# EAGLE board SCG-ECU_2.0_STM32F407_standalone_part_placement-EAGLE (EAGLE 7.5.0)
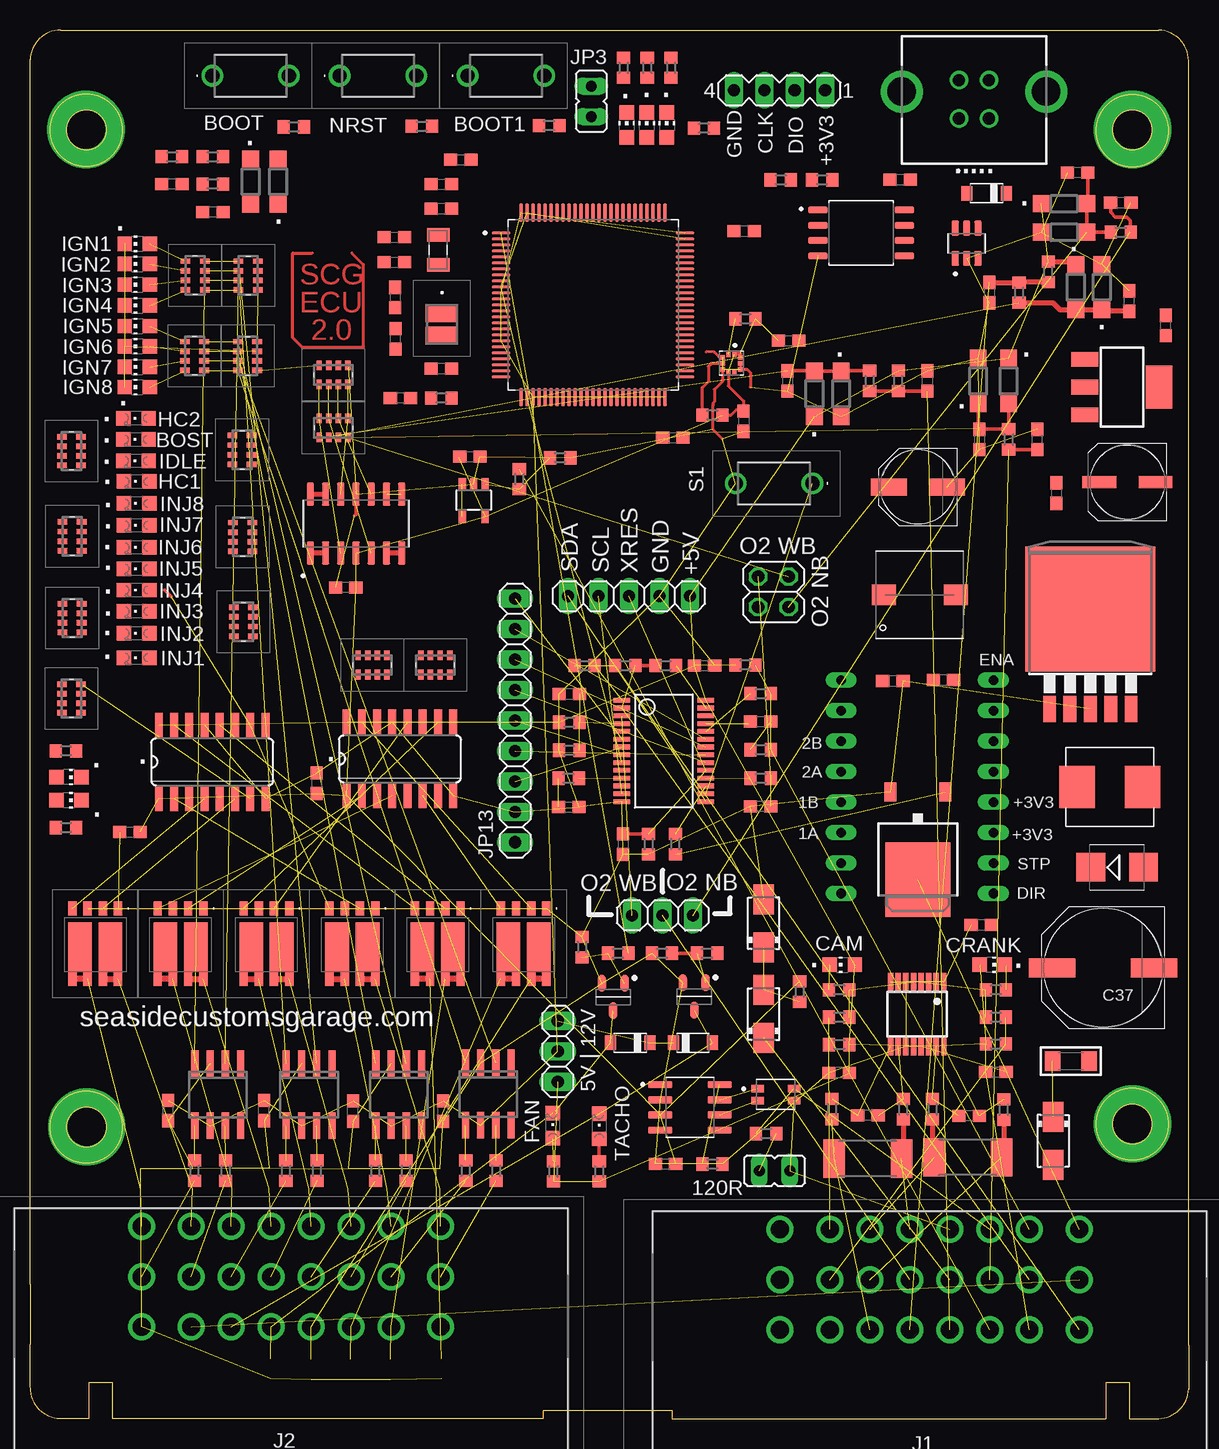
[diagram p0: board, top side]
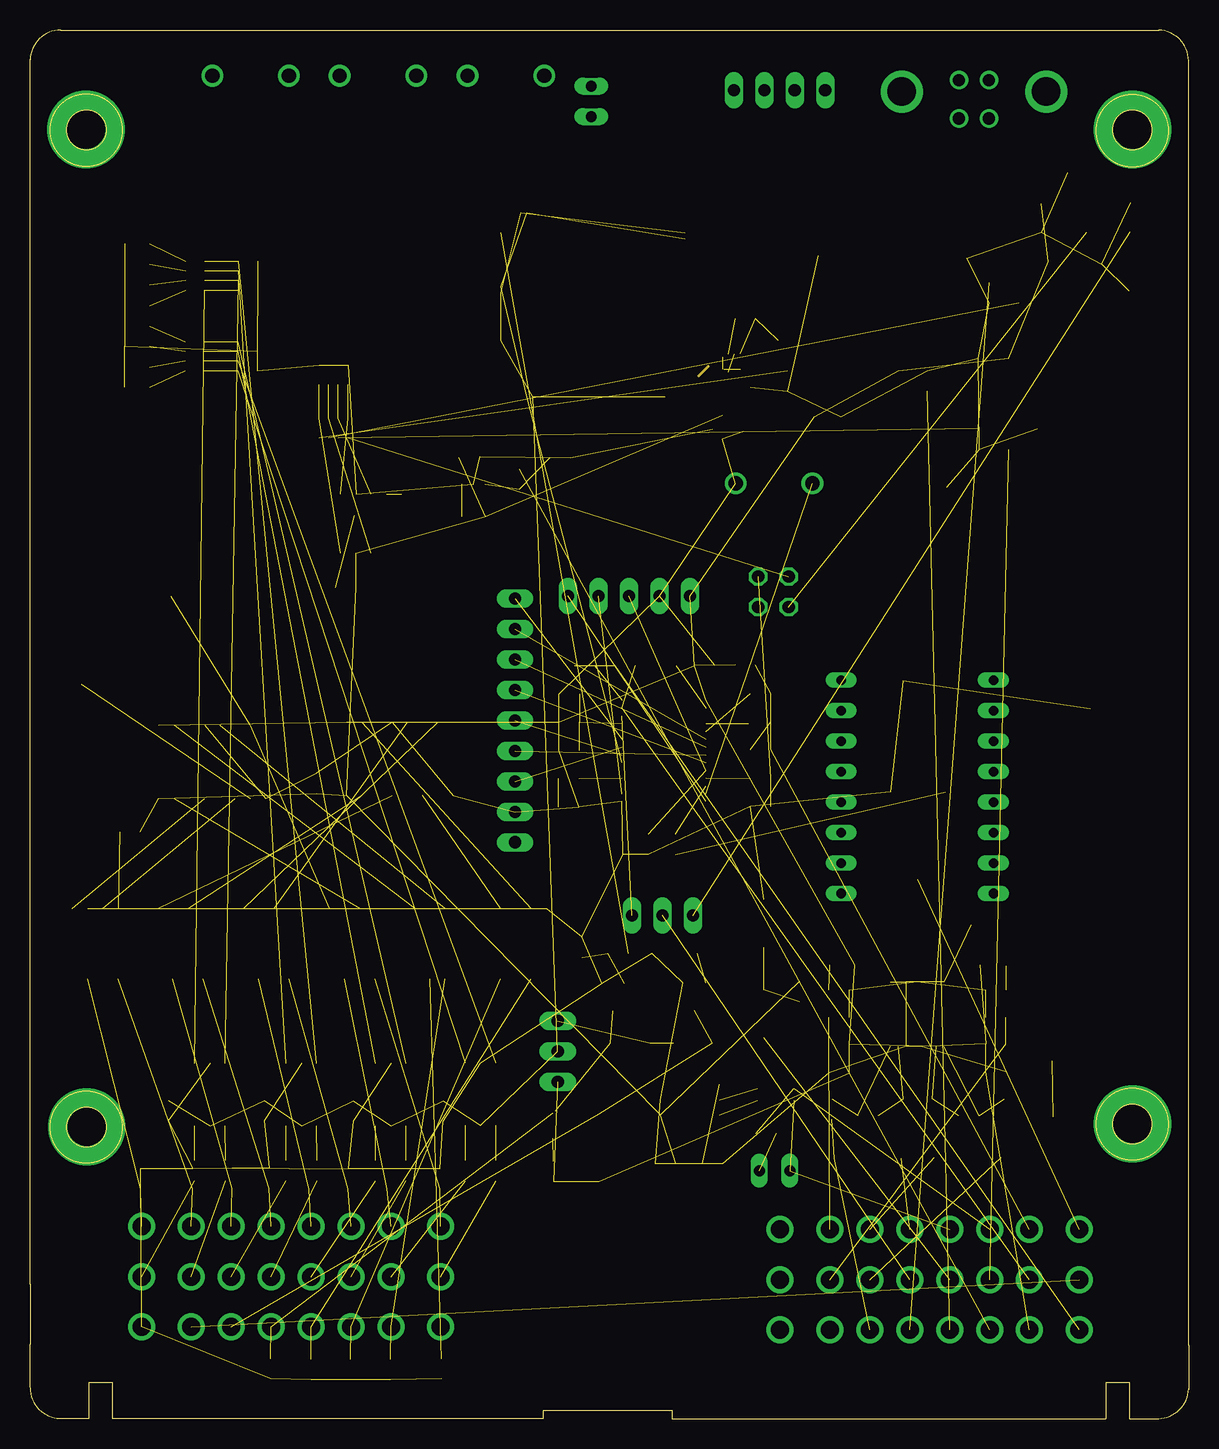
[diagram p1: board, inner layer POWER_AND_CPU]
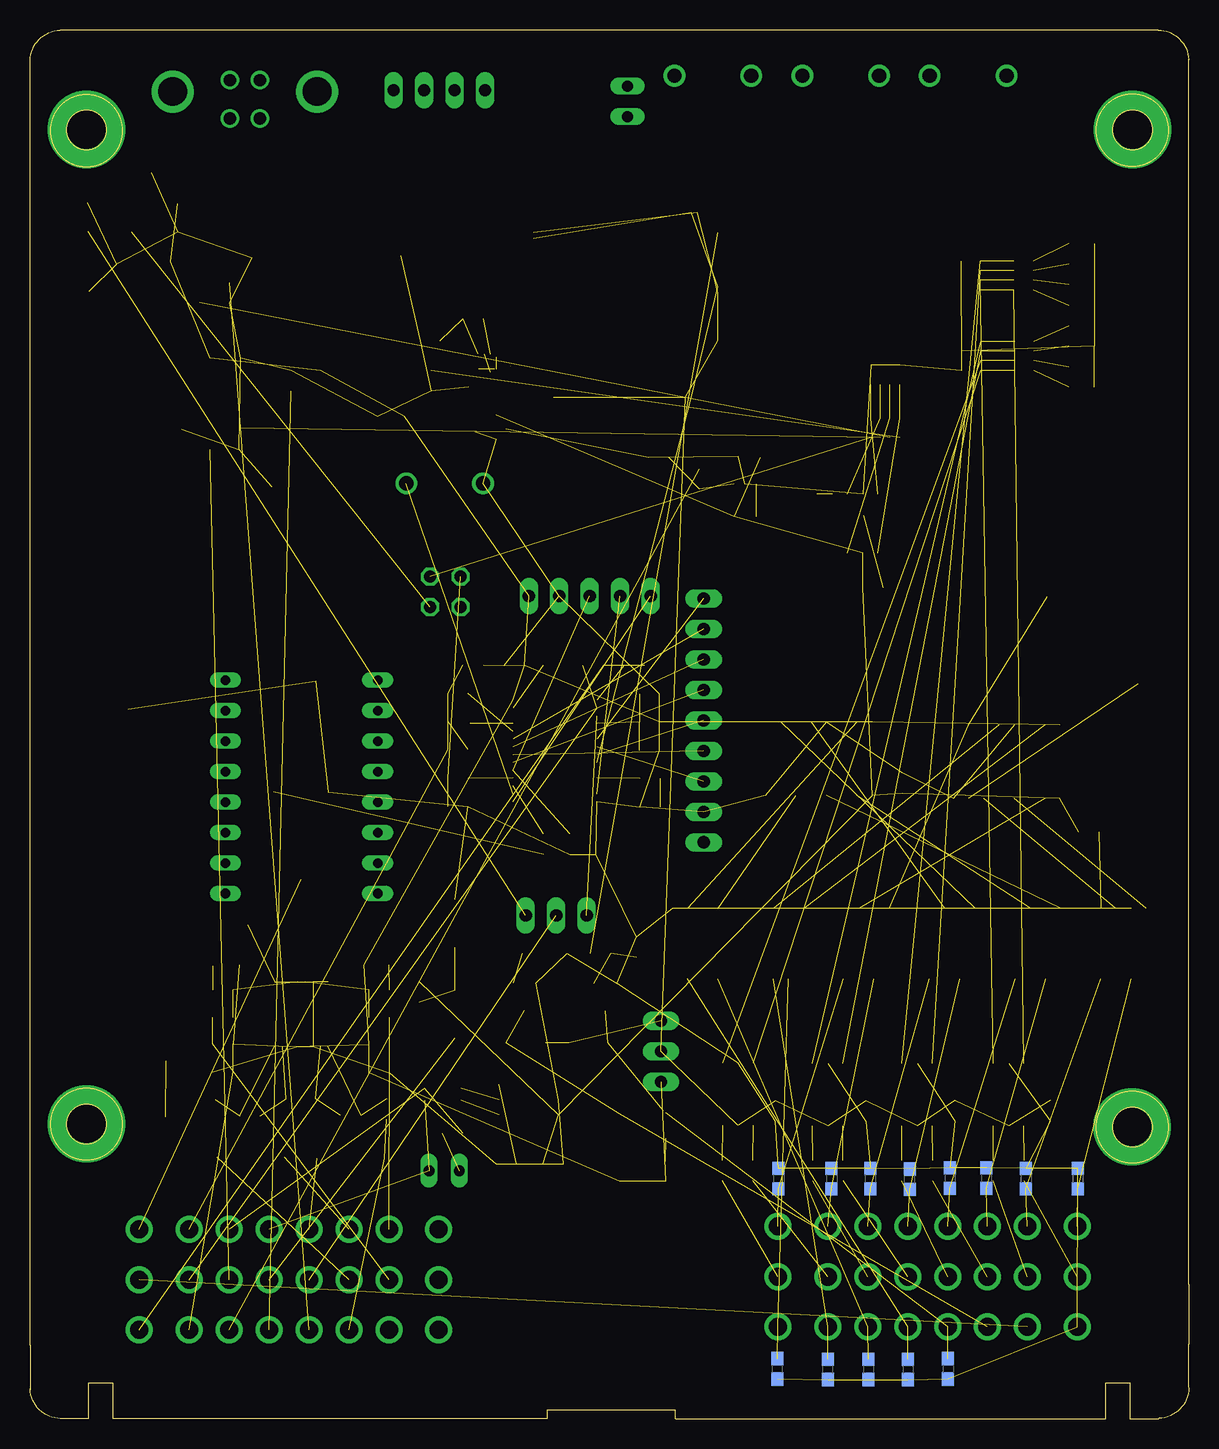
[diagram p2: board, bottom side, seen from below]

Size 96.6 x 115.75 mm. Coordinates in mm from the lower left corner, seen from the top.
Outline: 96.6,113.21 96.6,11.1 96.6,10.93 96.6,6.6 96.6,6.1 96.6,2.4
Outline: 94.1,0 91.7,0 91.7,3 89.7,3 89.7,0 53.5,0 53.5,0.7 42.8,0.7 42.8,0 6.9,0 6.9,3 4.9,3 4.9,0 2.5,0
Outline: 0,113.31 0,11.2 0,10.8 0,6.41 0,6.2
Outline: 0,2.6 0,6.2
Outline: 0,6.2 0,6.2
Outline: 33.92,115.76 94.1,115.76
Outline: 2.55,115.76 33.92,115.75
Outline: 0,2.56 arc86 2.49,0.01
Outline: 94.06,0 arc86 96.6,2.49
Outline: 96.59,113.2 arc86 94.1,115.75
Outline: 2.55,115.75 arc86 0,113.27
Outline: circle at 91.9,107.41 radius 1.65
Outline: circle at 91.9,107.36 radius 3
Outline: circle at 91.9,24.55 radius 1.65
Outline: circle at 91.9,24.55 radius 3
Outline: circle at 4.7,107.41 radius 1.65
Outline: circle at 4.7,107.41 radius 3
Outline: circle at 4.7,24.3 radius 1.65
Outline: circle at 4.7,24.3 radius 3
Copper layers (1*2*3*16): Top 0.035mm / dielectric 1.5mm / GND_AND_POWER 0.035mm / dielectric 0.15mm / POWER_AND_CPU 0.035mm / dielectric 0.2mm / Bottom 0.035mm
Design rules "default *": minimum track width 10mil, minimum drill 19mil, track to track 6mil, track to pad 6mil, pad to pad 6mil, via to via 6mil, smd to smd 6mil, copper to edge 40mil, drill to drill 6mil, minimum pad ring 10mil, minimum via ring 8mil, stop-mask expansion 4mil, vias tented up to drill 20mil, thermal gap 10mil

## Footprints (pad centres in the part's own frame; a part is rotated, then mirrored left to right if it is on the bottom)
PQFN50P200X200X80-10N = smd 0.43 x 0.35: 1 -0.745,0.25; 2 -0.745,-0.25; 6 0.745,-0.25; 7 0.745,0.25 | smd 0.35 x 0.43: 3 -0.5,-0.745; 4 0,-0.745; 5 0.5,-0.745; 8 0.5,0.745; 9 0,0.745; 10 -0.5,0.745
PTS636SM43LFS = drill 1.2 pad 1.8: 1 0,0; 2 6.4,0
CHIPLED_0805 = smd 1.2 x 1.2: A 0,-1.05; C 0,1.05
C0603 = smd 1.1 x 1: 1 -0.85,0; 2 0.85,0
PANASONIC_D = smd 3 x 1.4: + 2.4,0; - -2.4,0
UD-6,3X5,8_NICHICON = smd 2.8 x 1: + 2.35,0; - -2.35,0
PANASONIC_G = smd 3.9 x 1.6: + 4.25,0; - -4.25,0
SOD123 = smd 1.4 x 1.4: A 1.9,0; C -1.9,0
SOD3716X135N = smd 0.914 x 1.219: A 1.638,0; C -1.638,0
SMB = smd 2.4 x 2.4: A 2.2,0; C -2.2,0
DO214AC = smd 2.5 x 1.7: A 2,0; C -2,0
FIL_ACT1210L-201-2P-TL00 = smd 1.05 x 0.6: 1 -1.525,0.5; 2 -1.525,-0.5; 3 1.525,-0.5; 4 1.525,0.5
SO16 = smd 0.66 x 2.032: 1 -4.445,-3.073; 2 -3.175,-3.073; 3 -1.905,-3.073; 4 -0.635,-3.073; 5 0.635,-3.073; 6 1.905,-3.073; 7 3.175,-3.073; 8 4.445,-3.073; 9 4.445,3.073; 10 3.175,3.073; 11 1.905,3.073; 12 0.635,3.073; 13 -0.635,3.073; 14 -1.905,3.073; 15 -3.175,3.073; 16 -4.445,3.073
SOT223 = smd 1.219 x 2.235: 1 -2.311,-3.099; 2 0,-3.099; 3 2.311,-3.099 | smd 3.6 x 2.2: TAB 0,3.099
SOT23-5 = smd 0.6 x 1.05: 1 -0.95,-1.35; 2 0,-1.35; 3 0.95,-1.35; 4 0.95,1.35; 5 -0.95,1.35
TO263-5 = smd 1.067 x 2.159: 1 -3.404,-5.791; 2 -1.702,-5.791; 3 0,-5.791; 4 1.702,-5.791; 5 3.404,-5.791 | smd 10.8 x 10.41: 6 0,2.54
SSOP28 = smd 0.38 x 1.4: 1 -4.225,-3.5; 2 -3.575,-3.5; 3 -2.925,-3.5; 4 -2.275,-3.5; 5 -1.625,-3.5; 6 -0.975,-3.5; 7 -0.325,-3.5; 8 0.325,-3.5; 9 0.975,-3.5; 10 1.625,-3.5; 11 2.275,-3.5; 12 2.925,-3.5; 13 3.575,-3.5; 14 4.225,-3.5; 15 4.225,3.5; 16 3.575,3.5; 17 2.925,3.5; 18 2.275,3.5; 19 1.625,3.5; 20 0.975,3.5; 21 0.325,3.5; 22 -0.325,3.5; 23 -0.975,3.5; 24 -1.625,3.5; 25 -2.275,3.5; 26 -2.925,3.5; 27 -3.575,3.5; 28 -4.225,3.5
T0252 = smd 1 x 1.6: 1 -2.28,-6.07; 2 2.28,-6.07 | smd 5.4 x 6.2: 3 0,1.23
CHIP-LED0805 = smd 1.2 x 1.2: A 0,-1.05; C 0,1.05
HCCPHPE24BKA90FB = drill 1.5 pad 2.25: A1 0,0; A2 -4.15,0; A3 -7.48,0; A4 -10.81,0; A5 -14.14,0; A6 -17.47,0; A7 -20.8,0; A8 -24.95,0; B1 0,-4.2; B2 -4.15,-4.2; B3 -7.48,-4.2; B4 -10.81,-4.2; B5 -14.14,-4.2; B6 -17.47,-4.2; B7 -20.8,-4.2; B8 -24.95,-4.2; C1 0,-8.4; C2 -4.15,-8.4; C3 -7.48,-8.4; C4 -10.81,-8.4; C5 -14.14,-8.4; C6 -17.47,-8.4; C7 -20.8,-8.4; C8 -24.95,-8.4
M701-330442 = drill 1.02 pad 1.55: 1 1.25,2.25; 2 -1.25,2.25; 3 -1.25,-0.95; 4 1.25,-0.95 | drill 2.4 pad 3.5: 5 -6.02,0; 6 6.02,0
JP1 = drill 0.914 long: 1 0,-1.27; 2 0,1.27
1X03 = drill 1.016 long: 1 -2.54,0; 2 0,0; 3 2.54,0
1X05 = drill 1.016 long: 1 -5.08,0; 2 -2.54,0; 3 0,0; 4 2.54,0; 5 5.08,0
2X02 = drill 1.016 octagon: 1 -1.27,-1.27; 2 -1.27,1.27; 3 1.27,-1.27; 4 1.27,1.27
1X09 = drill 1.016 long: 1 -10.16,0; 2 -7.62,0; 3 -5.08,0; 4 -2.54,0; 5 0,0; 6 2.54,0; 7 5.08,0; 8 7.62,0; 9 10.16,0
WE-PD_7332/7345_PLASTIC_BASE = smd 1.7 x 2: 1 0,3; 2 0,-3
WE-LHMI_7030/7050 = smd 2.95 x 3.5: 1 -2.725,0; 2 2.725,0
L1206 = smd 1.3 x 1.6: 1 -1.524,0; 2 1.524,0
BUK9K5260RAX = smd 0.7 x 1.15: 1 -1.905,-3.026; 2 -0.635,-3.026; 3 0.635,-3.026; 4 1.905,-3.026 | smd 0.7 x 1.2: 5 1.905,2.849; 6 0.635,2.849; 7 -0.635,2.849; 8 -1.905,2.849 | smd 1.97 x 4.1: 9 1.27,0.199; 10 -1.27,0.199
SOT95P280X135-3N = smd 1.4 x 0.65: 1 -1.15,0.95; 2 -1.15,-0.95; 3 1.15,0
R0603 = smd 1 x 1.1: 1 -0.85,0; 2 0.85,0
R2512 = smd 1.8 x 3.2: 1 -2.8,0; 2 2.8,0
EXB38V561JV = smd 0.45 x 0.8: 1 -1.2,-0.8; 2 -0.4,-0.8; 3 0.4,-0.8; 4 1.2,-0.8; 5 1.2,0.8; 6 0.4,0.8; 7 -0.4,0.8; 8 -1.2,0.8
STEP-STICK = drill 0.8 long: 1A -8.89,-7.62; 1B -8.89,-5.08; 2A -8.89,-2.54; 2B -8.89,0; DIR 3.81,-12.7; EN 3.81,5.08; GND -8.89,-12.7; GNDM -8.89,2.54; MS1 3.81,2.54; MS2 3.81,0; MS3 3.81,-2.54; RST 3.81,-5.08; SLP 3.81,-7.62; SPT 3.81,-10.16; VCC -8.89,-10.16; VMOT -8.89,5.08
MA04-1 = drill 1.016 long: 1 -3.81,0; 2 -1.27,0; 3 1.27,0; 4 3.81,0
SOIC127P600X175-8N = smd 1.97 x 0.6: 1 -2.475,1.905; 2 -2.475,0.635; 3 -2.475,-0.635; 4 -2.475,-1.905; 5 2.475,-1.905; 6 2.475,-0.635; 7 2.475,0.635; 8 2.475,1.905
SOIC127P600X175-14N = smd 1.9 x 0.6: 1 -2.455,3.81; 2 -2.455,2.54; 3 -2.455,1.27; 4 -2.455,0; 5 -2.455,-1.27; 6 -2.455,-2.54; 7 -2.455,-3.81; 8 2.455,-3.81; 9 2.455,-2.54; 10 2.455,-1.27; 11 2.455,0; 12 2.455,1.27; 13 2.455,2.54; 14 2.455,3.81
QFP50P1600X1600X160-100N = smd 1.56 x 0.28: 1 -7.68,6; 2 -7.68,5.5; 3 -7.68,5; 4 -7.68,4.5; 5 -7.68,4; 6 -7.68,3.5; 7 -7.68,3; 8 -7.68,2.5; 9 -7.68,2; 10 -7.68,1.5; 11 -7.68,1; 12 -7.68,0.5; 13 -7.68,0; 14 -7.68,-0.5; 15 -7.68,-1; 16 -7.68,-1.5; 17 -7.68,-2; 18 -7.68,-2.5; 19 -7.68,-3; 20 -7.68,-3.5; 21 -7.68,-4; 22 -7.68,-4.5; 23 -7.68,-5; 24 -7.68,-5.5; 25 -7.68,-6; 51 7.68,-6; 52 7.68,-5.5; 53 7.68,-5; 54 7.68,-4.5; 55 7.68,-4; 56 7.68,-3.5; 57 7.68,-3; 58 7.68,-2.5; 59 7.68,-2; 60 7.68,-1.5; 61 7.68,-1; 62 7.68,-0.5; 63 7.68,0; 64 7.68,0.5; 65 7.68,1; 66 7.68,1.5; 67 7.68,2; 68 7.68,2.5; 69 7.68,3; 70 7.68,3.5; 71 7.68,4; 72 7.68,4.5; 73 7.68,5; 74 7.68,5.5; 75 7.68,6 | smd 0.28 x 1.56: 26 -6,-7.68; 27 -5.5,-7.68; 28 -5,-7.68; 29 -4.5,-7.68; 30 -4,-7.68; 31 -3.5,-7.68; 32 -3,-7.68; 33 -2.5,-7.68; 34 -2,-7.68; 35 -1.5,-7.68; 36 -1,-7.68; 37 -0.5,-7.68; 38 0,-7.68; 39 0.5,-7.68; 40 1,-7.68; 41 1.5,-7.68; 42 2,-7.68; 43 2.5,-7.68; 44 3,-7.68; 45 3.5,-7.68; 46 4,-7.68; 47 4.5,-7.68; 48 5,-7.68; 49 5.5,-7.68; 50 6,-7.68; 76 6,7.68; 77 5.5,7.68; 78 5,7.68; 79 4.5,7.68; 80 4,7.68; 81 3.5,7.68; 82 3,7.68; 83 2.5,7.68; 84 2,7.68; 85 1.5,7.68; 86 1,7.68; 87 0.5,7.68; 88 0,7.68; 89 -0.5,7.68; 90 -1,7.68; 91 -1.5,7.68; 92 -2,7.68; 93 -2.5,7.68; 94 -3,7.68; 95 -3.5,7.68; 96 -4,7.68; 97 -4.5,7.68; 98 -5,7.68; 99 -5.5,7.68; 100 -6,7.68
SOIC127P790X216-8N = smd 1.61 x 0.58: 1 -3.605,1.905; 2 -3.605,0.635; 3 -3.605,-0.635; 4 -3.605,-1.905; 5 3.605,-1.905; 6 3.605,-0.635; 7 3.605,0.635; 8 3.605,1.905
SOT95P280X145-6N = smd 1.21 x 0.59: 1 -1.255,0.95; 2 -1.255,0; 3 -1.255,-0.95; 4 1.255,-0.95; 5 1.255,0; 6 1.255,0.95
SO-8 = smd 0.6 x 2.2: 1 -1.905,-2.6; 2 -0.635,-2.6; 3 0.635,-2.6; 4 1.905,-2.6; 5 1.905,2.6; 6 0.635,2.6; 7 -0.635,2.6; 8 -1.905,2.6
QSOP16 = smd 0.45 x 1.5: 1 -2.223,-2.69; 2 -1.587,-2.69; 3 -0.953,-2.69; 4 -0.318,-2.69; 5 0.318,-2.69; 6 0.953,-2.69; 7 1.587,-2.69; 8 2.223,-2.69; 9 2.223,2.69; 10 1.587,2.69; 11 0.953,2.69; 12 0.318,2.69; 13 -0.318,2.69; 14 -0.953,2.69; 15 -1.587,2.69; 16 -2.223,2.69
XTAL_ABS07-32.768KHZ-9-T = smd 1.1 x 1.9: 1 -1.25,0; 2 1.25,0
NX3225GD8MHZSTDCRA3 = smd 1.5 x 2.7: 1 -0.95,0; 2 0.95,0

## Placement (x,y rotation side)
A1  LPS22HBTR  [PQFN50P200X200X80-10N]  58.47,87.97 270 top
BOOT  PTS636_SM43_LFS  [PTS636SM43LFS]  15.19,111.95 0 top
BOOT1  PTS636_SM43_LFS  [PTS636SM43LFS]  36.48,111.95 0 top
BOST  LED  [CHIPLED_0805]  8.84,81.62 90 top
C1  100nF  [C0603]  90.94,101.38 0 top
C2  100nF  [C0603]  52.99,21.22 0 top
C3  22nF  [C0603]  19.92,20.05 270 bottom
C4  22nF  [C0603]  16.87,20.05 270 bottom
C5  1uF  [C0603]  26.93,25.64 90 top
C6  100nF  [C0603]  79.3,41.13 180 top
C7  220nF  [C0603]  87.33,103.87 180 top
C8  100nF 50V  [C0603]  71.94,61.5 0 top
C9  100nF  [C0603]  79.96,93.86 270 top
C10  220nF  [C0603]  91.65,93.15 90 top
C11  100nF  [C0603]  74.83,86.5 90 top
C12  220nF  [C0603]  63.15,86.5 270 top
C13  100nF  [C0603]  83.98,81.62 90 top
C14  220nF  [C0603]  79.15,81.62 270 top
C15  100uF 35V  [PANASONIC_D]  74.02,77.66 180 top
C16  100nF  [C0603]  26.32,69.27 180 top
C17  100nF 50V  [C0603]  76.15,61.55 180 top
C18  100nF  [C0603]  72.55,103.26 180 top
C19  100nF  [C0603]  11.84,102.9 180 top
C20  220nF  [C0603]  15.24,100.57 180 top
C21  1uF  [C0603]  34.45,25.64 90 top
C22  2,2uF  [C0603]  53.6,81.77 0 top
C23  100nF  [C0603]  80.52,28.89 0 top
C24  1uF  [C0603]  67.47,28.84 180 top
C25  1nF  [C0603]  69.85,25.28 180 top
C26  1nF  [C0603]  78.29,25.23 180 top
C27  100nF  [C0603]  36.68,80.2 0 top
C28  2,2uF  [C0603]  59.54,98.99 0 top
C29  20pF  [C0603]  30.43,93.45 270 top
C30  1uF  [C0603]  19.51,25.69 90 top
C31  20pF  [C0603]  30.48,90 90 top
C32  100nf  [C0603]  34.29,87.51 180 top
C33  1uF  [C0603]  11.54,25.69 90 top
C34  1uF  [C0603]  30.89,85.07 180 top
C35  1uF  [C0603]  34.29,102.9 0 top
C36  220uF  [UD-6,3X5,8_NICHICON]  91.49,78.06 180 top
C37  470uF 50V  [PANASONIC_G]  89.46,37.57 180 top
C38  100nf  [C0603]  34.29,100.87 0 top
C39  1uF  [C0603]  35.92,104.94 0 top
C40  20pF  [C0603]  30.38,98.48 0 top
C41  22nF  [C0603]  13.57,20 270 bottom
C42  22nF  [C0603]  9.25,20 270 bottom
C43  20pF  [C0603]  30.38,96.4 0 top
C44  100nF  [C0603]  59.49,83.14 270 top
C45  22nF  [C0603]  34.19,20 270 bottom
C46  100nF  [C0603]  8.34,48.9 0 top
C47  100nF  [C0603]  23.88,52.97 270 top
C48  10uF  [C0603]  85.55,77.15 270 top
C49  10uF  [C0603]  94.7,91.12 90 top
C50  4.7uF  [C0603]  63.25,89.85 0 top
C51  22nF  [C0603]  29.77,20 270 bottom
C54  22nF  [C0603]  30.08,4.1 90 bottom
C55  22nF  [C0603]  34.29,4.15 90 bottom
C60  22nF  [C0603]  23.27,19.95 90 bottom
C61  22nF  [C0603]  26.52,20 90 bottom
C64  22nF  [C0603]  20.07,4.15 270 bottom
C65  22nF  [C0603]  23.42,4.1 270 bottom
C66  22nF  [C0603]  26.72,4.1 270 bottom
C78  100nf  [C0603]  56.24,62.77 0 top
C79  1uf  [C0603]  60.91,58.1 0 top
C80  1uf  [C0603]  44.96,60.38 180 top
C81  10nf  [C0603]  49.43,47.89 270 top
C82  1uf  [C0603]  60.91,51.04 180 top
C83  1uf  [C0603]  44.91,50.99 0 top
D1  1N5819HW-7-F  [SOD123]  86.21,101.28 0 top
D2  1N5819HW-7-F  [SOD123]  86.21,98.89 180 top
D3  B5819W-TP  [SOD3716X135N]  79.76,102.14 180 top
D4  B5819W-TP  [SOD3716X135N]  55.27,31.33 0 top
D5  1N5819HW-7-F  [SOD123]  87.18,94.32 270 top
D6  1N5819HW-7-F  [SOD123]  89.36,94.32 90 top
D7  1N5819HW-7-F  [SOD123]  65.38,85.43 90 top
D8  1N5819HW-7-F  [SOD123]  67.62,85.43 270 top
D9  1N5819HW-7-F  [SOD123]  81.59,86.5 270 top
D10  1N5819HW-7-F  [SOD123]  79.05,86.5 90 top
D11  1N5819  [SOD123]  18.39,103.11 270 top
D12  1N5819  [SOD123]  20.68,103.11 90 top
D13  B5819W-TP  [SOD3716X135N]  50.04,31.33 180 top
D15  [SMB]  90.63,45.96 0 top
D17  B340A 3A  [DO214AC]  85.3,23.15 270 top
D18  1N4001 SMA  [DO214AC]  61.17,33.71 90 top
D19  1N4001 SMA  [DO214AC]  61.17,41.28 90 top
FL1  ACT1210L-201-2P-TL00  [FIL_ACT1210L-201-2P-TL00]  62.18,27.01 0 top
HC1  LED  [CHIPLED_0805]  8.89,78.11 90 top
HC2  LED  [CHIPLED_0805]  8.84,83.4 90 top
IC1  4504D  [SO16]  15.19,54.75 0 top
IC2  4504D  [SO16]  30.84,55 0 top
IC3  LM1117IMPX-3.3  [SOT223]  91.04,85.99 270 top
IC5  LMV321_SOT23-5DBV  [SOT23-5]  36.99,76.54 180 top
IC6  LM2596S  [TO263-5]  88.4,64.96 0 top
IC7  CY8C24223A  [SSOP28]  52.84,55.66 270 top
IC8  [T0252]  74.02,46.16 180 top
IDLE  LED  [CHIPLED_0805]  8.84,79.84 90 top
IGN1  LED  [CHIP-LED0805]  8.94,97.93 90 top
IGN2  LED  [CHIP-LED0805]  8.94,96.25 90 top
IGN3  LED  [CHIP-LED0805]  8.94,94.52 90 top
IGN4  LED  [CHIP-LED0805]  8.94,92.79 90 top
IGN5  LED  [CHIP-LED0805]  8.94,91.07 90 top
IGN6  LED  [CHIP-LED0805]  8.94,89.39 90 top
IGN7  LED  [CHIP-LED0805]  8.94,87.66 90 top
IGN8  LED  [CHIP-LED0805]  8.94,85.99 90 top
INJ1  LED  [CHIPLED_0805]  8.89,63.43 90 top
INJ2  LED  [CHIPLED_0805]  8.89,65.46 90 top
INJ3  LED  [CHIPLED_0805]  8.89,67.29 90 top
INJ4  LED  [CHIPLED_0805]  8.89,69.07 90 top
INJ5  LED  [CHIPLED_0805]  8.89,70.85 90 top
INJ6  LED  [CHIPLED_0805]  8.89,72.63 90 top
INJ7  LED  [CHIPLED_0805]  8.89,74.46 90 top
INJ8  LED  [CHIPLED_0805]  8.89,76.28 90 top
J1  HCCPHPE24BKA90F-B  [HCCPHPE24BKA90FB]  87.48,15.78 0 top
J2  HCCPHPE24BKA90F-B  [HCCPHPE24BKA90FB]  34.24,16.04 0 top
J4  M701-330442  [M701-330442]  78.69,110.63 180 top
JP1  120R  [JP1]  62.08,20.66 90 top
JP2  [1X03]  44,30.62 90 top
JP3  UART  [JP1]  46.79,109.81 0 top
JP6  [1X05]  49.94,68.56 180 top
JP7  [1X03]  52.73,41.94 0 top
JP8  [2X02]  61.98,68.92 270 top
JP13  [1X09]  40.44,58.2 90 top
L2  8.2uH 2.7A  [WE-PD_7332/7345_PLASTIC_BASE]  74.17,68.66 90 top
L4  33uH 1.9A 0.2R WE-LHMI  [WE-LHMI_7030/7050]  90.02,52.66 0 top
L5  600R 2A  [L1206]  86.77,29.8 180 top
LED6  VR1  [CHIP-LED0805]  80.22,37.83 270 top
LED7  VR2  [CHIP-LED0805]  67.72,37.83 90 top
LED10  FAN  [CHIPLED_0805]  43.59,24.42 0 top
LED11  TACHO  [CHIPLED_0805]  47.45,24.37 0 top
LED19  +5V  [CHIP-LED0805]  3.26,51.54 270 top
LED20  +3V3  [CHIP-LED0805]  3.26,53.48 270 top
LED27  LED  [CHIP-LED0805]  53.09,107.83 0 top
LED28  LED  [CHIP-LED0805]  51.41,107.83 0 top
LED29  LED  [CHIP-LED0805]  49.74,107.83 0 top
NRST  PTS636_SM43_LFS  [PTS636SM43LFS]  25.81,111.95 0 top
Q1  BUK9K52-60RAX  [BUK9K5260RAX]  19.71,39.51 180 top
Q2  BUK9K52-60RAX  [BUK9K5260RAX]  41.15,39.51 180 top
Q3  BUK9K52-60RAX  [BUK9K5260RAX]  5.44,39.51 180 top
Q4  BUK9K52-60RAX  [BUK9K5260RAX]  26.88,39.51 180 top
Q5  BUK9K52-60RAX  [BUK9K5260RAX]  33.99,39.51 180 top
Q6  IRLML0030TRPBF  [SOT95P280X135-3N]  48.62,35.14 270 top
Q7  BUK9K52-60RAX  [BUK9K5260RAX]  12.55,39.51 180 top
Q8  IRLML0030TRPBF  [SOT95P280X135-3N]  55.38,35.19 270 top
R1  2.2K  [R0603]  59.64,91.68 0 top
R2  2.2K  [R0603]  56.9,83.65 0 top
R4  22R  [R0603]  28.81,20.66 270 top
R5  560R  [R0603]  43.64,20.61 90 top
R6  22R  [R0603]  31.35,20.66 270 top
R8  560R  [R0603]  47.45,20.61 90 top
R10  22R  [R0603]  36.33,20.66 270 top
R11  470R  [R0603]  3,55.66 0 top
R12  22R  [R0603]  38.87,20.66 270 top
R17  10K  [R0603]  32.67,107.73 180 top
R18  10K  [R0603]  56.19,107.58 0 top
R19  120R  [R0603]  61.37,23.76 180 top
R20  10K  [R0603]  22,107.68 180 top
R21  470R  [R0603]  90.94,98.89 180 top
R22  10K  [R0603]  56.9,21.22 0 top
R24  47R  [R0603]  34.29,85.07 180 top
R25  470R  [R0603]  49.48,112.61 270 top
R26  10K  [R0603]  43.29,107.78 180 top
R27  10K  [R0603]  66.04,103.26 180 top
R28  10K  [R0603]  72.8,25.79 270 top
R29  4K7 3W  [R2512]  78.19,21.78 180 top
R32  4K7 3W  [R2512]  69.85,21.67 180 top
R35  22R  [R0603]  13.72,20.66 270 top
R36  22R  [R0603]  16.31,20.66 270 top
R38  470R  [R0603]  53.45,112.61 270 top
R39  470R  [R0603]  51.46,112.61 270 top
R40  470R  [R0603]  82.45,93.86 270 top
R41  2K49  [R0603]  84.89,95.59 90 top
R42  470R  [R0603]  70.01,86.5 90 top
R43  2K49  [R0603]  72.39,86.5 90 top
R44  470R  [R0603]  81.59,81.62 90 top
R46  470R  [R0603]  15.24,102.9 0 top
R47  1K  [R0603]  15.24,105.19 180 top
R48  6K34  [R0603]  11.84,105.19 180 top
R49  10K  [R0603]  62.59,103.26 180 top
R50  100R  [R0603]  49.03,38.79 0 top
R52  10K  [R0603]  80.52,31.22 0 top
R53  1K  [R0603]  80.52,33.46 180 top
R54  1K  [R0603]  67.47,33.46 180 top
R55  10K  [R0603]  67.47,31.17 180 top
R57  10K  [R0603]  66.86,25.79 270 top
R59  10K  [R0603]  75.24,25.79 270 top
R60  10K  [R0603]  81.18,25.74 270 top
R61  47K  [R0603]  46.03,39.3 90 top
R64  10K  [R0603]  80.52,35.75 0 top
R65  10K  [R0603]  67.47,35.75 180 top
R67  22R  [R0603]  21.34,20.66 270 top
R68  22R  [R0603]  23.93,20.66 270 top
R70  2,2K  [R0603]  64.16,35.59 90 top
R71  100R  [R0603]  56.44,38.79 0 top
R74  47K  [R0603]  52.68,38.79 180 top
R76  180K +/-0.1%  [R0603]  40.8,78.32 90 top
R77  330K +/-0.1%  [R0603]  44.2,80.09 180 top
R80  560R  [R0603]  3,49.26 0 top
R150  1k  [R0603]  46.23,62.77 180 top
R151  61.9  [R0603]  49.64,62.77 180 top
R152  10k  [R0603]  60.91,55.76 180 top
R153  1k  [R0603]  44.96,58.05 0 top
R154  1k  [R0603]  52.99,62.77 180 top
R155  120k  [R0603]  59.64,62.82 180 top
R156  1k  [R0603]  60.91,60.43 180 top
R157  1k  [R0603]  44.96,55.71 180 top
R158  10k  [R0603]  51.57,47.89 270 top
R159  1k  [R0603]  60.91,53.37 0 top
R160  1k  [R0603]  44.91,53.37 0 top
R161  1k  [R0603]  53.8,47.89 270 top
RN1  560R  [EXB38V561JV]  3.51,66.73 90 top
RN2  560R  [EXB38V561JV]  3.51,73.54 270 top
RN3  560R  [EXB38V561JV]  3.46,80.65 270 top
RN4  4K7  [EXB38V561JV]  25.3,82.58 0 top
RN5  9K1  [EXB38V561JV]  25.3,87 180 top
RN6  10K  [EXB38V561JV]  3.46,60.03 270 top
RN7  10K  [EXB38V561JV]  28.55,62.82 180 top
RN8  10K  [EXB38V561JV]  33.79,62.82 180 top
RN9  68K  [EXB38V561JV]  17.68,80.75 90 top
RN10  68K  [EXB38V561JV]  17.78,66.43 90 top
RN11  68K  [EXB38V561JV]  17.73,73.49 90 top
RN12  100K  [EXB38V561JV]  18.19,95.28 90 top
RN13  100K  [EXB38V561JV]  18.14,88.58 90 top
RN14  470R  [EXB38V561JV]  13.77,95.28 270 top
RN15  470R  [EXB38V561JV]  13.72,88.58 270 top
S1  PTS636_SM43_LFS  [PTS636SM43LFS]  65.23,77.96 180 top
STEPSTICK-X  STEP-STICK  [STEP-STICK]  76.51,56.47 0 top
SV1  [MA04-1]  62.49,110.73 180 top
U1  SN65HVD230QDR  [SOIC127P600X175-8N]  55.02,25.94 0 top
U2  MCP6004T-I/SL  [SOIC127P600X175-14N]  27.18,74.61 90 top
U3  STM32F407VGT6  [QFP50P1600X1600X160-100N]  46.94,92.85 0 top
U4  W25Q16JVSSIQ  [SOIC127P790X216-8N]  69.3,98.84 0 top
U5  USBLC6-2SC6  [SOT95P280X145-6N]  78.08,97.98 90 top
U$3  TC427SO-8  [SO-8]  30.74,27.01 180 top
U$4  TC427SO-8  [SO-8]  38.21,27.06 180 top
U$9  TC427SO-8  [SO-8]  23.27,27.01 180 top
U$10  MAX9926  [QSOP16]  73.97,33.71 180 top
U$11  TC427SO-8  [SO-8]  15.65,27.01 180 top
Y1  ABS07-32.768KHZ-9-T  [XTAL_ABS07-32.768KHZ-9-T]  34.04,97.42 270 top
Y3  NX3225GD-8MHZ-STD-CRA-3  [NX3225GD8MHZSTDCRA3]  34.34,91.22 270 top

## Library data of the parts
A1 = LPS22HBTR_baro_sensor_JLCPCB_C94049; AVAILABILITY: In Stock; DESCRIPTION: Pressure Sensor 3.77PSI ~ 18.27PSI (26kPa ~ 126kPa) Absolute 24 b 10-WFLGA Exposed Pad; MF: STMicroelectronics; MP: LPS22HBTR; PACKAGE: WFLGA-10 STMicroelectronics; PRICE: None; PURCHASE-URL: https://pricing.snapeda.com/search/part/LPS22HBTR/?ref=eda
BOOT BOOT1 NRST S1 = SamacSys_Parts; DESCRIPTION: Tactile Switches Tact 50mA 12VDC, 6.0x3.5, 4.3mm H, 180gf, THT leads, Black Actuator; HEIGHT: 4.5mm; MANUFACTURER_NAME: C & K COMPONENTS; MANUFACTURER_PART_NUMBER: PTS636 SM43 LFS; MOUSER_PART_NUMBER: 611-PTS636SM43LFS; MOUSER_PRICE-STOCK: https://www.mouser.co.uk/ProductDetail/CK/PTS636-SM43-LFS?qs=vLWxofP3U2yx5eBOPf861w%3D%3D
BOST HC1 HC2 IDLE IGN1-IGN8 INJ1-INJ8 LED6 LED7 LED10 LED11 LED19 LED20 LED27-LED29 = led
C1-C35 C37-C51 C54 C55 C60 C61 C64-C66 R1 R2 R4-R6 R8 R10-R12 R17-R22 R24-R29 R32 R35 R36 R38-R44 R46-R50 R52-R55 R57 R59-R61 R64 R65 R67 R68 R70 R71 R74 R76 R77 R80 = resistor
C36 = rcl; VOLTAGE: 6.3V
C78-C83 R150-R161 = rcl
D1 D2 D5-D12 D15 = diode
D3 D4 D13 = B5819W-TP; AVAILABILITY: In Stock; DESCRIPTION: Diode Schottky 40 V 1A Surface Mount SOD-123; MF: Micro Commercial; MP: B5819W-TP; PACKAGE: SOD-123 Multicomp; PRICE: None; PURCHASE-URL: https://pricing.snapeda.com/search/part/B5819W-TP/?ref=eda
D17-D19 = DO-214AC; MF: Fairchild; MPN: S1A; OC_FARNELL: 9843868; OC_NEWARK: 58K9551
FL1 = ACT1210L-201-2P-TL00_C529452; AVAILABILITY: In Stock; DESCRIPTION: 200µH @ 100kHz 2 Line Common Mode Choke Surface Mount 70mA DCR 5.5Ohm; MF: TDK; MP: ACT1210L-201-2P-TL00; PACKAGE: Horizontal-4 TDK Corporation; PRICE: None; PURCHASE-URL: https://pricing.snapeda.com/search/part/ACT1210L-201-2P-TL00/?ref=eda
IC1 IC2 = 45xx
IC3 = lm1117
IC5 = LMV321 SOT23-5
IC6 = national-semiconductor; MF: NATIONAL SEMICONDUCTOR; MPN: LM2596S-ADJ/NOPB; OC_FARNELL: 9494367; OC_NEWARK: 41K3842
IC7 = Cy8C24223A
IC8 = FET_T252
J1 J2 = SamacSys_Parts; DESCRIPTION: Automotive Connectors 24W PIN HEADER R ANGLE SLD BLK; HEIGHT: 27.6mm; MANUFACTURER_NAME: Delphi; MANUFACTURER_PART_NUMBER: HCCPHPE24BKA90F-B; MOUSER_PART_NUMBER: 694-HCCPHPE24BKA90FB; MOUSER_PRICE-STOCK: https://www.mouser.co.uk/ProductDetail/Aptiv-formerly-Delphi/HCCPHPE24BKA90F-B/?qs=9PkijCQ%2Fg7bGuEmX2cA%252BPg%3D%3D
J4 = SamacSys_Parts; DESCRIPTION: Type B USB PCB socket connector, 4P HARWIN 1 Port Straight Through Hole Mount Female USB Connector, 500 V ac, 1.5A; HEIGHT: mm; MANUFACTURER_NAME: Harwin; MANUFACTURER_PART_NUMBER: M701-330442; MOUSER_PART_NUMBER: 855-M701-330442; MOUSER_PRICE-STOCK: https://www.mouser.co.uk/ProductDetail/Harwin/M701-330442?qs=x6EjVpvqMVOIQFAB0splYQ%3D%3D
JP1 JP3 = jumper
JP2 JP6-JP8 JP13 = pinhead
L2 L4 = Wurth Passive
L5 = rc-master-smd
Q1-Q5 Q7 = BUK9K52-60RAX; DESCRIPTION: Dual N-channel 60 V, 55 mOhm logic level MOSFET in LFPAK56D using Repetitive Avalanche technology; HEIGHT: 1.15mm; MANUFACTURER_NAME: Nexperia; MANUFACTURER_PART_NUMBER: BUK9K52-60RAX; MOUSER_PART_NUMBER: 771-BUK9K52-60RAX; MOUSER_PRICE-STOCK: https://www.mouser.co.uk/ProductDetail/Nexperia/BUK9K52-60RAX?qs=KUoIvG%2F9IlaWzvOIq4T2bg%3D%3D
Q6 Q8 = ipc-7351-transistor
RN1-RN15 = SamacSys_Parts; DESCRIPTION: Resistor Networks & Arrays 560 OHM 5%; HEIGHT: 0.6mm; MANUFACTURER_NAME: Panasonic; MANUFACTURER_PART_NUMBER: EXB-38V561JV; MOUSER_PART_NUMBER: 667-EXB-38V561JV; MOUSER_PRICE-STOCK: https://www.mouser.co.uk/ProductDetail/Panasonic/EXB-38V561JV/?qs=cttFivMKqWwQvdopgsSMTA%3D%3D
STEPSTICK-X = Arduino library Stepstick
SV1 = con-lstb; OC_FARNELL: unknown; OC_NEWARK: unknown
U1 = SN65HVD230QDR; AVAILABILITY: Good; DESCRIPTION: Automotive Catalog 3.3-V CAN Transceivers 8-SOIC -40 to 125; MF: Texas Instruments; MP: SN65HVD230QDR; PACKAGE: SOIC-8 Texas Instruments; PRICE: 1.62 USD
U2 = MCP6004T-I_SL_JLC_C7378; AVAILABILITY: In Stock; DESCRIPTION: Op Amp Quad Low Power Amplifier R-R I/O 6V Automotive 14-Pin SOIC N T/R; MF: Microchip Technology; MP: MCP6004T-I/SL; PACKAGE: SOIC-14 Microchip; PRICE: None; PURCHASE-URL: https://pricing.snapeda.com/search/part/MCP6004T-I/SL/?ref=eda
U3 = STM32F407VGT6_jlcpcb-C12345; AVAILABILITY: In Stock; DESCRIPTION: ARM® Cortex®-M4 STM32F4 Microcontroller IC 32-Bit Single-Core 168MHz 1MB (1M x 8) FLASH 100-LQFP (14x14); MF: STMicroelectronics; MP: STM32F407VGT6; PACKAGE: LQFP-100 STMicroelectronics; PRICE: None; PURCHASE-URL: https://pricing.snapeda.com/search/part/STM32F407VGT6/?ref=eda
U4 = W25Q16JVSSIQ; AVAILABILITY: In Stock; DESCRIPTION: FLASH - NOR Memory IC 16Mb (2M x 8) SPI - Quad I/O 133 MHz 8-SOIC; MF: Winbond Electronics; MP: W25Q16JVSSIQ; PACKAGE: SOIC-8 Winbond; PRICE: None; PURCHASE-URL: https://pricing.snapeda.com/search/part/W25Q16JVSSIQ/?ref=eda
U5 = USBLC6-2SC6; AVAILABILITY: In Stock; DESCRIPTION: 17V Clamp 5A (8/20µs) Ipp Tvs Diode Surface Mount SOT-23-6; MF: STMicroelectronics; MP: USBLC6-2SC6; PACKAGE: SOT-23-6 STMicroelectronics; PRICE: None; PURCHASE-URL: https://pricing.snapeda.com/search/part/USBLC6-2SC6/?ref=eda
U$3 U$4 U$9 U$11 = TC426,427,428
U$10 = max9926
Y1 = ABS07-32.768KHZ-9-T; AVAILABILITY: In Stock; DESCRIPTION: 32.768 kHz ±20ppm Crystal 9pF 70 kOhms 2-SMD, No Lead; MF: Abracon; MP: ABS07-32.768KHZ-9-T; PACKAGE: SMD-2 Abracon LLC; PRICE: None; PURCHASE-URL: https://pricing.snapeda.com/search/part/ABS07-32.768KHZ-9-T/?ref=eda
Y3 = NX3225GD-8MHZ-STD-CRA-3; DESCRIPTION: A small surface-mount type crystal unit, ideal for an engine control CPU clock; delivering the high reliability that is particularly demanded by autom; HEIGHT: 1mm; MANUFACTURER_NAME: NDK; MANUFACTURER_PART_NUMBER: NX3225GD-8MHZ-STD-CRA-3; MOUSER_PART_NUMBER: 344-NX3225GD8MCRA3; MOUSER_PRICE-STOCK: https://www.mouser.co.uk/ProductDetail/NDK/NX3225GD-8MHZ-STD-CRA-3?qs=55YtniHzbhDA0fw3anYH2g%3D%3D

## Nets
+3V3: A1.1 A1.6 A1.10 C2.2 C16.1 C27.1 C44.1 C46.2 C47.2 C50.1 IC1.1 IC2.1 IC5.5 R1.2 R2.2 R70.2 U1.3 U2.4
+5V: C23.1 C24.1 C78.1 D1.C D5.C D7.C D9.C IC1.16 IC2.16 IC7.28 J1.C2 JP2.1 JP6.1 LED6.A LED7.A R5.1 R8.1 R41.2 R43.2 R52.1 R55.1 R153.1 R155.2 U$10.14
+12V: D4.C D13.C JP2.3
AC_TEMP_SENSE_OUT: C79.1 IC7.25
APE_ADC: IC7.1 R150.1
BARO_SCL: A1.2 R1.1
BARO_SDA: A1.4 R2.1
BOOST: C66.1 J2.C3 Q2.5 Q2.6 Q2.9
BOOST_CPU: IC2.7
BOOST_TC4: IC2.6 Q2.4
CAM_CPU: R54.1 R65.1 U$10.5
CAN_H: FL1.4 J1.A3 R19.2
CAN_L: FL1.3 J1.A4 JP1.1
CANRX: U1.4
CANTX: U1.1
CLT: C12.1 D7.A D8.C R42.2 RN4.1
CLT_CPU: U2.1 U2.2
CLUTCH_CPU: D18.A D19.C R70.1
CLUTCH_IN: D18.C J1.B4
COOLANT_SENSOR: C11.1 J1.C4 R42.1 R43.1
CRANK_CPU: R53.2 R64.1 U$10.4
FAN: C64.1 D13.A J2.C5 LED10.C Q6.3
FAN_CPU: R50.2 U3.1
GND: A1.3 A1.5 A1.8 A1.9 C1.2 C2.1 C3.1 C4.1 C5.1 C6.2 C7.2 C8.2 C9.2 C10.2 C11.2 C12.2 C13.2 C14.2 C15.- C16.2 C21.1 C23.2 C24.2 C27.2 C30.1 C33.1 C41.1 C42.1 C44.2 C45.1 C46.1 C47.1 C50.2 C51.1 C54.1 C55.1 C60.2 C61.2 C64.2 C65.2 C66.2 C78.2 C80.2 C81.2 C82.2 C83.2 D2.A D6.A D8.A D10.A D19.A IC1.8 IC1.13 IC2.8 IC2.13 IC5.2 IC6.3 IC7.14 IC8.2 IGN1.C IGN2.C IGN3.C IGN4.C IGN5.C IGN6.C IGN7.C IGN8.C J2.C8 JP6.2 JP13.2 Q1.1 Q1.3 Q2.1 Q2.3 Q3.1 Q3.3 Q4.1 Q4.3 Q5.1 Q5.3 Q6.2 Q7.1 Q7.3 Q8.2 R22.2 R61.2 R74.2 R77.1 R157.2 R158.2 RN5.1 RN5.2 RN5.3 RN5.4 RN12.1 RN12.2 RN12.3 RN12.4 RN13.1 RN13.2 RN13.3 RN13.4 S1.2 U1.2 U2.11 U4.4 U5.2 U$3.3 U$4.3 U$9.3 U$10.1 U$10.3 U$10.6 U$10.8 U$10.11 U$10.13 U$11.3
HALL1: J1.B7 R52.2 R53.1
HALL2: J1.A7 R54.2 R55.2
HC1: C60.1 J2.A4 Q1.5 Q1.6 Q1.9
HC1_CPU: IC2.9
HC1_TC4: IC2.10 Q1.4
HC2: C61.1 J2.A3 Q1.7 Q1.8 Q1.10
HC2_CPU: IC2.11
HC2_TC4: IC2.12 Q1.2
IAT: C10.1 D5.A D6.C R40.2 RN4.2
IAT_CPU: U2.6 U2.7
IAT_SENSOR: C9.1 J1.C5 R40.1 R41.1
IDLE: C65.1 J2.C4 Q2.7 Q2.8 Q2.10
IDLE_CPU: IC2.14
IDLE_TC4: IC2.15 Q2.2
IGN1: J2.B5 R68.2
IGN1_CPU: RN12.5 RN14.8 U$9.2
IGN2: J2.B6 R67.2
IGN2_CPU: RN12.6 RN14.7 U$9.4
IGN3: J2.B7 R36.2
IGN3_CPU: RN12.7 RN14.6 U$11.2
IGN4: J2.B8 R35.2
IGN4_CPU: RN12.8 RN14.5 U$11.4
IGN5: J2.B3 R6.2
IGN5_CPU: RN13.5 RN15.8 U$3.2
IGN6: J2.B4 R4.2
IGN6_CPU: RN13.6 RN15.7 U$3.4
IGN7: J2.B1 R12.2
IGN7_CPU: RN13.7 RN15.6 U$4.2
IGN8: J2.B2 R10.2
IGN8_CPU: RN13.8 RN15.5 U$4.4
INJ1_CPU: IC1.7 RN6.8
INJ1_TC4: IC1.6 Q3.2
INJ2_CPU: IC1.5
INJ2_TC4: IC1.4 Q3.4
INJ3_CPU: IC1.3
INJ3_TC4: IC1.2 Q4.2
INJ4_CPU: IC1.9
INJ4_TC4: IC1.10 Q4.4
INJ5_CPU: IC1.11
INJ5_TC4: IC1.12 Q5.2
INJ6_CPU: IC1.14
INJ6_TC4: IC1.15 Q5.4
INJ7_CPU: IC2.3
INJ7_TC4: IC2.2 Q7.2
INJ8_CPU: IC2.5
INJ8_TC4: IC2.4 Q7.4
INJECTOR1: C41.2 J2.A7 Q3.7 Q3.8 Q3.10
INJECTOR2: C42.2 J2.A8 Q3.5 Q3.6 Q3.9
INJECTOR3: C45.2 J2.A1 Q4.7 Q4.8 Q4.10
INJECTOR4: C51.2 J2.A2 Q4.5 Q4.6 Q4.9
INJECTOR5: C54.2 J2.C2 Q5.7 Q5.8 Q5.10
INJECTOR6: C55.2 J2.C1 Q5.5 Q5.6 Q5.9
INJECTOR7: C3.2 J2.A5 Q7.7 Q7.8 Q7.10
INJECTOR8: C4.2 J2.A6 Q7.5 Q7.6 Q7.9
INSAMP_VREF: C80.1 IC7.4 R153.2 R157.1
LCD_DB4: IC7.20 JP13.6
LCD_DB5: IC7.8 JP13.5
LCD_DB6: IC7.21 JP13.4
LCD_DB7: IC7.7 JP13.3
LCD_E: IC7.22 JP13.7
LCD_RS: IC7.6 JP13.9
LCD_RW: IC7.23 JP13.8
LIN_OUT2: C83.1 R160.1
LSU_HEATER-: IC8.3 J1.A1
LSU_IA: IC7.2 J1.B2 R151.1 R154.2
LSU_IP: J1.C1 R150.2 R151.2
LSU_NERMEST: J1.A2 R152.1 R155.1 R156.1
LSU_VGND: IC7.3 JP7.1
MAP_CONV: J1.C3 R76.2
MAP_CPU: IC5.3 IC5.4
N$1: Q8.1 R71.1 R74.1
N$2: C25.2 R57.1 U$10.9
N$3: R67.1 U$9.5
N$5: R68.1 U$9.7
N$6: R35.1 U$11.5
N$8: R36.1 U$11.7
N$9: Q6.1 R50.1 R61.1
N$12: JP1.2 R19.1
N$15: R22.1 U1.8
N$16: IGN8.A RN15.4
N$17: FL1.2 U1.6
N$19: FL1.1 U1.7
N$25: IGN7.A RN15.3
N$35: IC7.16 S1.1
N$36: C26.1 R60.1 U$10.16
N$37: C26.2 R59.1 U$10.15
N$38: C25.1 R28.1 U$10.10
N$42: RN4.6 RN5.7 U2.10
N$43: D17.C L5.2
N$44: IC5.1 R76.1 R77.2
N$45: RN4.5 RN5.8 U2.12
N$49: LED7.C R65.2
N$50: LED6.C R64.2
N$54: LED10.A R5.2
N$55: LED11.A R8.2
N$65: RN4.7 RN5.6 U2.5
N$66: RN4.8 RN5.5 U2.3
N$70: R4.1 U$3.5
N$71: R6.1 U$3.7
N$72: IGN6.A RN15.2
N$73: IGN5.A RN15.1
N$74: R10.1 U$4.5
N$75: R12.1 U$4.7
N$76: IGN4.A RN14.4
N$77: IGN3.A RN14.3
N$78: IGN2.A RN14.2
N$87: C79.2 R152.2
N$91: IC8.1 R161.2
N$327: IGN1.A RN14.1
NB_OUT2: C82.1 JP8.1 R159.2
O2: JP8.2 RN4.4
O2_CPU: U2.13 U2.14
O2_JUMPER: C7.1 D1.A D2.C JP8.4 R21.2
O2_SENSOR: C1.1 JP7.3 R21.1
O2_SENSOR_WBO: J1.B5 JP7.2
PROG_SCL: IC7.13 JP6.4
PROG_SDA: IC7.15 JP6.5
PWM_HEATER: IC7.17 R161.1
PWM_LIN_OUT: IC7.11 R160.2
PWM_NB_OUT: IC7.18 R159.1
RE+_ADC: IC7.24 R156.2
RT_ADC: IC7.27 R154.1
STEP_1A: J1.C7
STEP_1B: J1.A8
STEP_2A: J1.B8
STEP_2B: J1.C8
SWCLK: U3.76
SWDIO: U3.72
TACHO: D4.A J2.C6 LED11.C Q8.3
TACHO_CPU: R71.2
TPS: C14.1 D9.A D10.C R44.2 RN4.3
TPS_CPU: U2.8 U2.9
TPS_SIGNAL: C13.1 J1.B3 R44.1
TX_CPU: U3.68
USB_OTG+: U3.71
USB_OTG-: U3.70
VBAT: U3.6
VBUS: U5.5
VCC: U4.8
VDD: C5.2 C21.2 C30.2 C33.2 JP2.2 U3.11 U3.19 U3.28 U3.50 U3.75 U3.100 U$3.6 U$4.6 U$9.6 U$11.6
VDDA: U3.22
VIN: J1.B1 J2.C7
VR1+: J1.B6 R29.1 R60.2
VR1-: J1.A6 R29.2 R59.2
VR2+: J1.C6 R32.2 R57.2
VR2-: J1.A5 R28.2 R32.1
VREF+: U3.21
VSS: IC7.9 U3.10 U3.27 U3.74 U3.99
VSSA: U3.20
XRES: C81.1 IC7.19 JP6.3 R158.1

## Tracks (layer width: path | path; a pad name or v marks a point on that pad's centre or on a via)
+3V3  (14 unrouted)
  Top 0.254: A1.1 | R2.2 58.42,83.65 58.88,84.11 59.38,84.11 C44.1 59.49,84.82 58.23,86.09 A1.6
  Top 0.305: A1.10 59.24,88.49 59.24,88.78 58.73,88.78 A1.1
  Top 0.406: 35.73,80.09 C27.1
+5V  (22 unrouted)
  Top 0.406: R41.2 86.96,96.44 D5.C
+12V  (2 unrouted)
AC_TEMP_SENSE_OUT  (1 unrouted)
  Top 0.305: 59.9,57.93 C79.1
APE_ADC  (1 unrouted)
BARO_SCL  (1 unrouted)
BARO_SDA  (1 unrouted)
  Top 0.254: A1.4 56.8,87.97 56.8,87.92 56.6,87.71 56.54,87.71 56.6,87.66 56.6,86.5 56.05,85.95 R2.1
  POWER_AND_CPU 0.254: 55.73,86.9 56.54,87.71
BOOST  (2 unrouted)
  Top 0.508: Q2.9 39.88,38.54 40.54,37.88 40.54,36.68 Q2.6 Q2.5
BOOST_TC4  (1 unrouted)
CAM_CPU  (2 unrouted)
CAN_H  (2 unrouted)
CAN_L  (2 unrouted)
CLT  (1 unrouted)
  Top 0.305: C12.1 65.37,87.35 D7.A D8.C 67.64,87.35 R42.2
CLT_CPU
  Top 0.406: U2.2 U2.1
CLUTCH_CPU  (2 unrouted)
CLUTCH_IN  (1 unrouted)
COOLANT_SENSOR  (1 unrouted)
  Top 0.305: R42.1 R43.1 C11.1
CRANK_CPU  (2 unrouted)
FAN  (4 unrouted)
  Top 0.508: 43.79,25.67 LED10.C
FAN_CPU  (1 unrouted)
GND  (115 unrouted)
  Top 0.152: A1.3 57.87,88.47 | A1.5 57.87,87.47
  Top 0.254: A1.3 57.47,88.47 57.05,88.88 56.39,88.93 | 57.73,87.43 A1.5 57.73,86.46 57.05,85.78 57.05,84.77 56.95,84.67 56.95,84.46 56.9,84.41 56.9,82.48 57.71,81.67 | A1.9 A1.8 59.79,87.47 60.05,87.21 60.05,85.99
  Top 0.305: U2.11 27.18,75.37 27.08,75.27
HALL1  (2 unrouted)
HALL2  (2 unrouted)
HC1  (2 unrouted)
  Top 0.305: Q1.9 18.44,38.44 17.73,37.73 17.73,36.73 Q1.5
  Top 0.508: Q1.5 Q1.6
HC1_TC4  (1 unrouted)
HC2  (2 unrouted)
  Top 0.305: Q1.10 20.98,38.34 20.38,37.73 20.38,36.68 Q1.7
  Top 0.508: Q1.7 Q1.8
HC2_TC4  (1 unrouted)
IAT  (1 unrouted)
  Top 0.406: C10.1 89.48,92.3 D6.C D5.A 87.16,92.44 85.86,92.44 85.28,93.01 R40.2
IAT_CPU
  Top 0.406: U2.7 U2.6
IAT_SENSOR  (1 unrouted)
  Top 0.406: R41.1 82.48,94.74 R40.1 C9.1
IDLE  (2 unrouted)
  Top 0.508: Q2.10 42.42,38.49 43.03,37.88 43.03,36.68 Q2.8 Q2.7
IDLE_TC4  (1 unrouted)
IGN1  (1 unrouted)
IGN1_CPU  (2 unrouted)
IGN2  (1 unrouted)
IGN2_CPU  (2 unrouted)
  Top 0.305: RN14.7
IGN3  (1 unrouted)
IGN3_CPU  (2 unrouted)
IGN4  (1 unrouted)
IGN4_CPU  (2 unrouted)
IGN5  (1 unrouted)
IGN5_CPU  (2 unrouted)
IGN6  (1 unrouted)
IGN6_CPU  (2 unrouted)
IGN7  (1 unrouted)
IGN7_CPU  (2 unrouted)
IGN8  (1 unrouted)
IGN8_CPU  (2 unrouted)
  Top 0.305: RN15.5
INJ1_CPU  (1 unrouted)
  Top 0.305: 18.44,51.75 IC1.7
INJ1_TC4  (1 unrouted)
INJ2_TC4  (1 unrouted)
INJ3_CPU
  Top 0.305: 13.26,51.7 IC1.3
INJ3_TC4  (1 unrouted)
INJ4_TC4  (2 unrouted)
  Top 0.305: 18.39,57.79 IC1.10 | 11.23,69.07 11.79,68.51
INJ5_TC4  (1 unrouted)
  Top 0.305: 15.8,57.79 IC1.12
INJ6_TC4  (1 unrouted)
  Top 0.305: 11.99,57.79 IC1.15
INJ7_TC4  (1 unrouted)
INJ8_TC4  (1 unrouted)
INJECTOR1  (2 unrouted)
  Top 0.508: Q3.10 6.71,38.34 6.1,37.73 6.1,36.68 Q3.7 Q3.8
INJECTOR2  (2 unrouted)
  Top 0.508: Q3.9 4.17,38.54 3.56,37.93 3.56,36.68 Q3.5 Q3.6
INJECTOR3  (2 unrouted)
  Top 0.508: Q4.10 28.15,38.08 27.54,37.47 27.54,36.68 Q4.7 Q4.8
INJECTOR4  (2 unrouted)
  Top 0.508: Q4.9 25.61,38.18 25,37.58 25,36.68 Q4.5 Q4.6
INJECTOR5  (2 unrouted)
  Top 0.508: Q5.10 35.26,38.9 35.87,38.29 35.87,36.68 Q5.8 Q5.7
INJECTOR6  (2 unrouted)
  Top 0.508: Q5.9 32.72,38.64 33.38,37.98 33.38,36.68 Q5.6 Q5.5
INJECTOR7  (2 unrouted)
  Top 0.508: Q7.10 13.82,38.59 13.21,37.98 13.21,36.68 Q7.7 Q7.8
INJECTOR8  (2 unrouted)
  Top 0.508: Q7.9 11.28,38.29 11.84,37.73 11.84,36.73 Q7.6 Q7.5
INSAMP_VREF  (3 unrouted)
LCD_DB4  (1 unrouted)
LCD_DB5  (1 unrouted)
LCD_DB6  (1 unrouted)
LCD_DB7  (1 unrouted)
LCD_E  (1 unrouted)
LCD_RS  (1 unrouted)
LCD_RW  (1 unrouted)
LIN_OUT2  (1 unrouted)
LSU_HEATER-  (1 unrouted)
LSU_IA  (2 unrouted)
  Top 0.305: R154.2 R151.1
LSU_IP  (2 unrouted)
LSU_NERMEST  (3 unrouted)
LSU_VGND  (1 unrouted)
MAP_CONV  (1 unrouted)
MAP_CPU  (1 unrouted)
N$1  (1 unrouted)
  Top 0.305: R74.1 R71.1
N$2  (2 unrouted)
N$3  (1 unrouted)
N$5  (1 unrouted)
N$6  (1 unrouted)
N$8  (1 unrouted)
N$9  (2 unrouted)
N$11  (via drill 3.2 pad 6.45)
  other vias: 4.68,107.48
N$12  (1 unrouted)
N$15  (1 unrouted)
N$16  (1 unrouted)
N$17  (1 unrouted)
N$19  (1 unrouted)
N$20  (via drill 3.2 pad 6.45)
  other vias: 91.9,107.48
N$25  (1 unrouted)
N$34
  Top 0.254: 26.83,97.16 27.79,96.2 27.79,89.29 22.71,89.29 21.9,90.1 21.9,97.16 23.52,97.16
N$35  (1 unrouted)
N$36  (2 unrouted)
N$37  (2 unrouted)
N$38  (2 unrouted)
  Top 0.406: 70.72,25.3 C25.1
N$42  (2 unrouted)
N$43  (1 unrouted)
N$44  (2 unrouted)
N$45  (2 unrouted)
N$46  (via drill 3.2 pad 6.45)
  other vias: 91.9,24.57
N$47  (via drill 3.2 pad 6.45)
  other vias: 4.73,24.32
N$49  (1 unrouted)
N$50  (1 unrouted)
  Top 0.305: 81.37,37.72 LED6.C
N$54  (1 unrouted)
N$55
  Top 0.305: R8.2 LED11.A
N$65  (2 unrouted)
N$66  (2 unrouted)
N$70  (1 unrouted)
  Top 0.508: 28.83,21.53 R4.1
N$71  (1 unrouted)
N$72  (1 unrouted)
N$73  (1 unrouted)
N$74  (1 unrouted)
N$75  (1 unrouted)
N$76  (1 unrouted)
N$77  (1 unrouted)
N$78  (1 unrouted)
N$87  (1 unrouted)
N$91  (1 unrouted)
N$327  (1 unrouted)
NB_OUT2  (2 unrouted)
O2  (1 unrouted)
O2_CPU
  Top 0.254: 23.42,77.11 U2.14
  Top 0.406: U2.14 U2.13
O2_JUMPER  (1 unrouted)
  Top 0.305: C7.1 88.18,101.35 D1.A D2.C R21.2
  Top 0.406: D1.A 88.18,101.28
O2_SENSOR  (1 unrouted)
  Top 0.305: C1.1 90.09,100.55 90.48,100.16 91.44,100.16 91.75,99.86 91.75,98.93 R21.1
O2_SENSOR_WBO  (1 unrouted)
PROG_SCL  (1 unrouted)
PROG_SDA  (1 unrouted)
PWM_HEATER  (1 unrouted)
PWM_LIN_OUT  (1 unrouted)
PWM_NB_OUT  (1 unrouted)
RE+_ADC  (1 unrouted)
RT_ADC  (1 unrouted)
TACHO  (3 unrouted)
  Top 0.61: 57,31.24 D4.A
TPS  (1 unrouted)
  Top 0.305: D10.C 79.05,82.57 C14.1 R44.2 D9.A
TPS_CPU  (1 unrouted)
TPS_SIGNAL  (1 unrouted)
  Top 0.305: R44.1 C13.1
VDD  (14 unrouted)
  Top 0.61: 19.47,26.5 C30.2
VIN  (1 unrouted)
VR1+  (1 unrouted)
  Top 0.406: R60.2 81.18,21.97 R29.1
VR1-  (1 unrouted)
  Top 0.406: R59.2 75.24,21.92 R29.2
VR2+  (2 unrouted)
VR2-  (1 unrouted)
  Top 0.406: R28.2 72.8,21.82 R32.1
VSS  (4 unrouted)
XRES  (2 unrouted)
  Top 0.305: R158.1 C81.1

## Text on the board
Top: SCG | ECU | 2.0
tNames: . | . | . | . | GND | CLK | DIO | +3V3 | . | . | . | . | . | . | . | . | . | . | . | . | . | . | . | . | . | . | . | . | . | . | O2 WB | . | SDA | SCL | XRES | GND | +5V | . | . | O2 NB | . | . | ENA | 2B | . | . | . | 2A | 1B | +3V3 | . | 1A | +3V3 | STP | O2 NB | O2 WB | DIR | CAM | CRANK | . | . | seasidecustomsgarage.com | 5V | 12V | FAN | TACHO | 120R
tStop: SCG | ECU | 2.0